# Altium PCB watch_pcb.PcbDoc
Units mm, origin at the board's own origin, x right, y up, seen from the top; angles counter-clockwise.
Board outline 49 x 49 mm, 2 copper layers (Top Layer, Bottom Layer); 53 components, 37 nets, 217 pads, 31 vias.
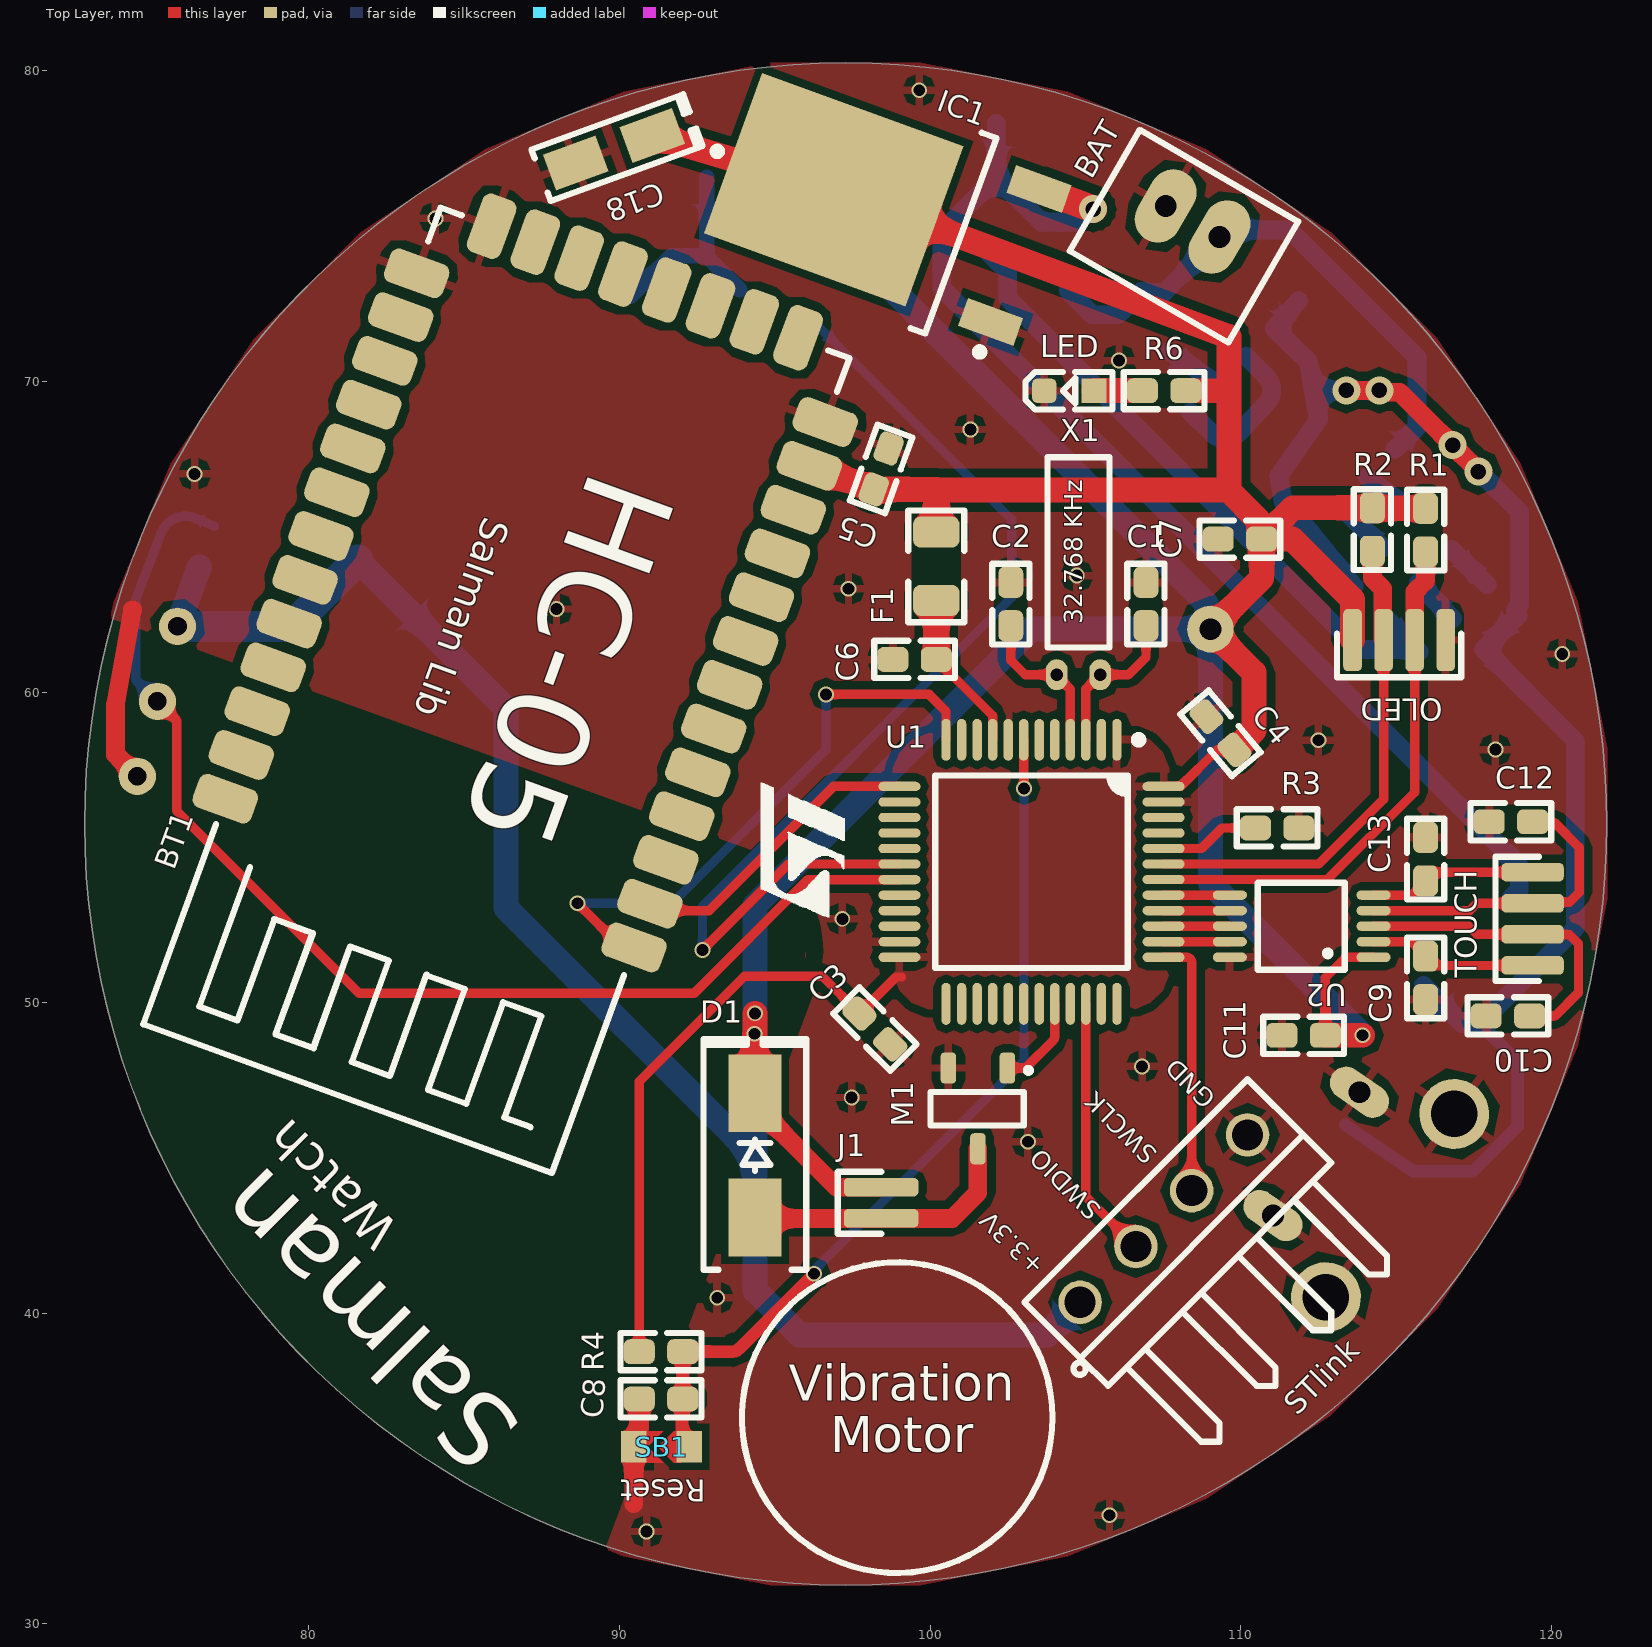
[diagram p0: Top Layer view]
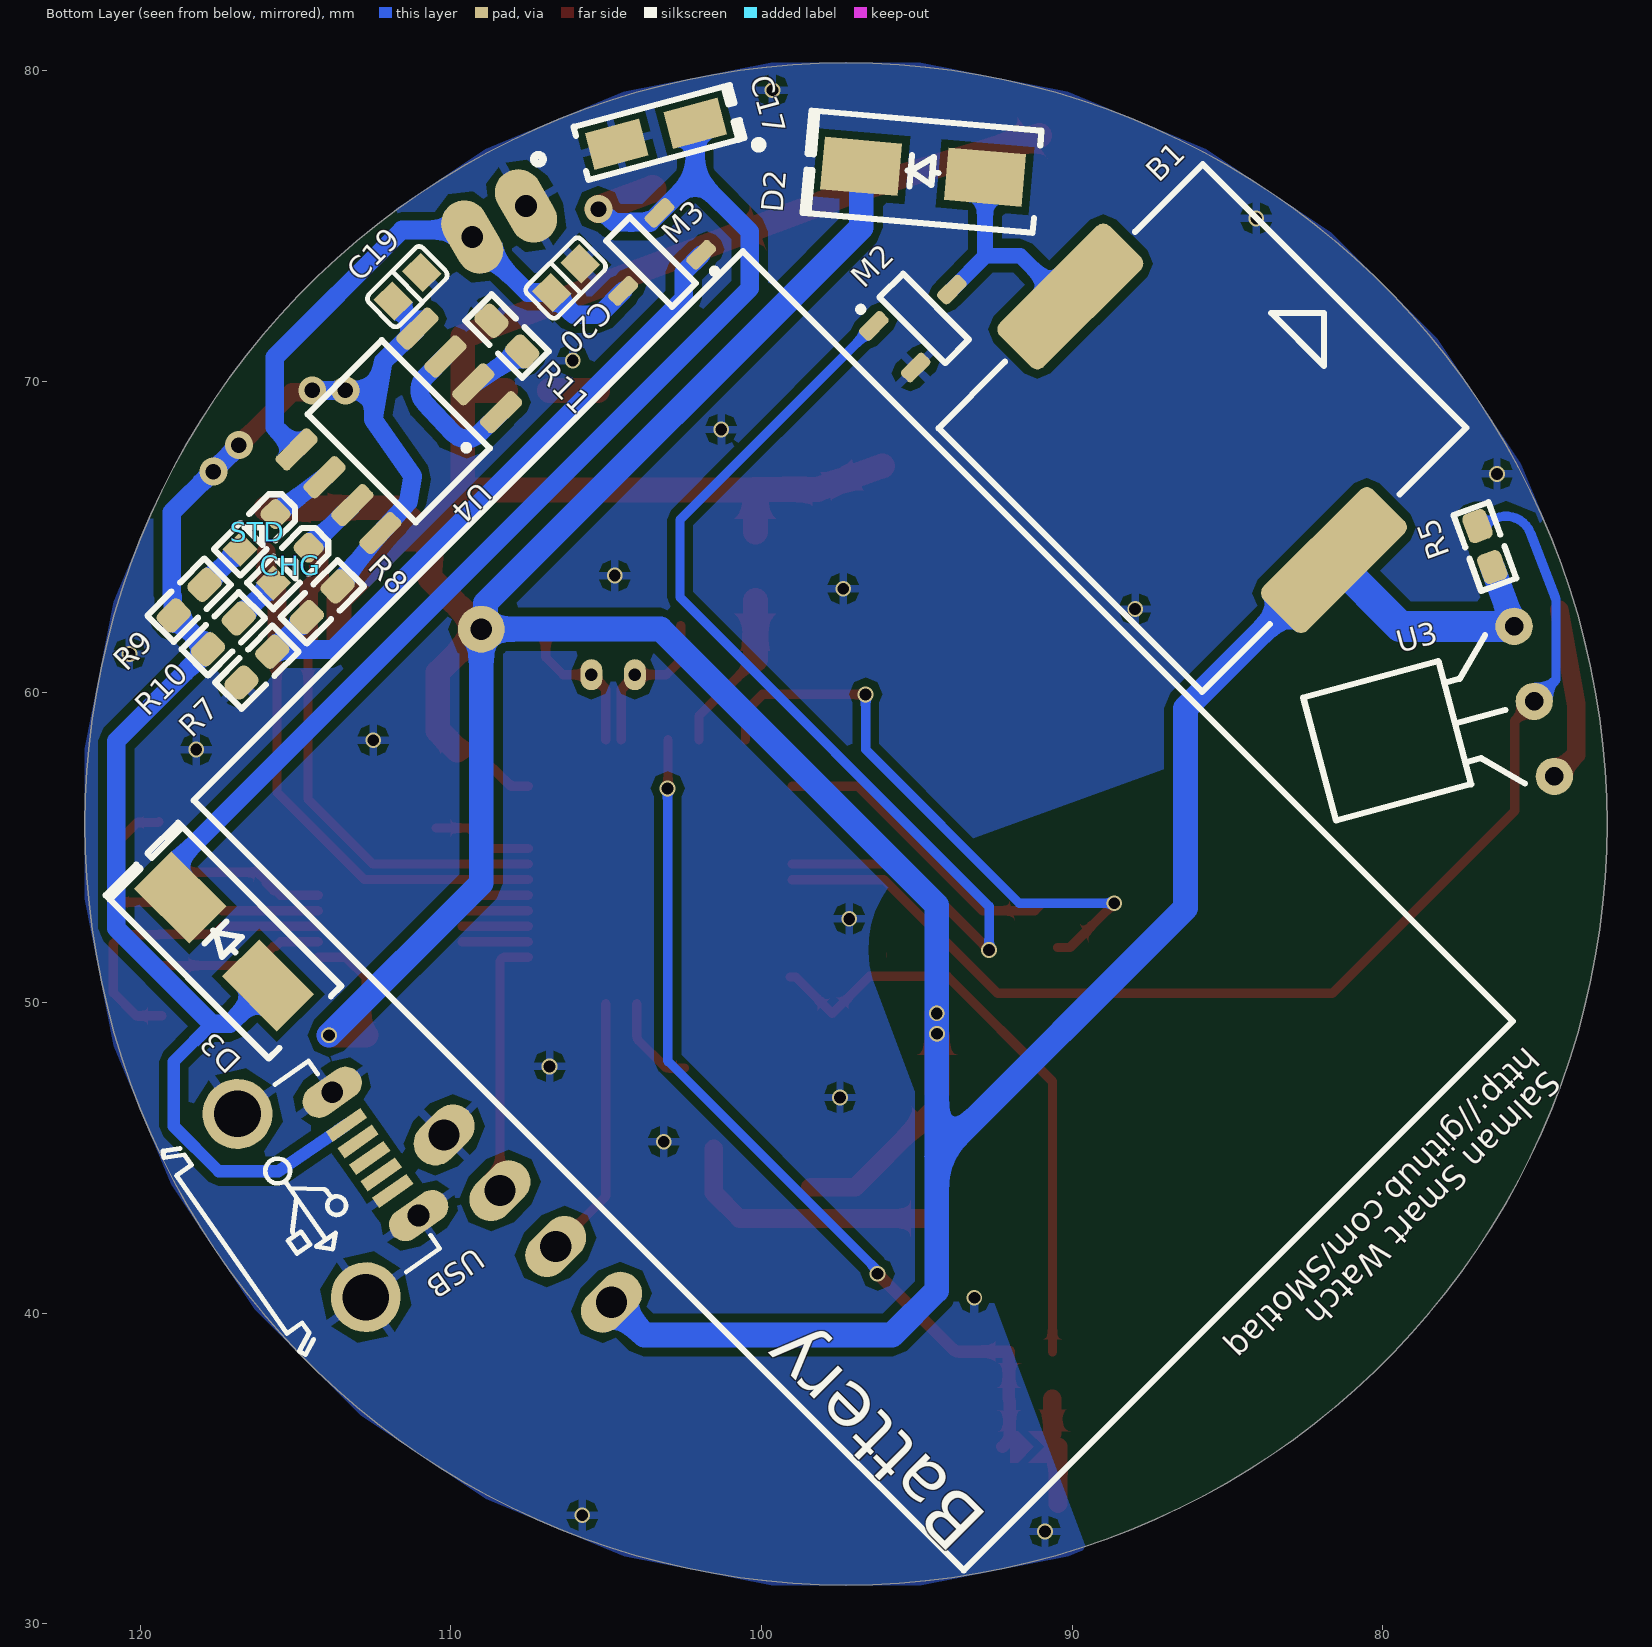
[diagram p1: Bottom Layer view, seen from below]

## Layer stack, top to bottom
Top Solder: solder mask 0.0102, Solder Resist, Dk 3.5
Top Layer: signal copper 0.0356
Dielectric 1: dielectric 0.32, FR-4, Dk 4.8
Bottom Layer: signal copper 0.0356
Bottom Solder: solder mask 0.0102, Solder Resist, Dk 3.5

## Board outline
72.782,55.753 ccw(c97.282,55.753) 97.282,31.253 ccw(c97.282,55.753) 121.782,55.753 ccw(c97.282,55.753) 97.282,80.253 ccw(c97.282,55.753)

## Design rules (kind name [scope] priority, off if disabled: settings)
Clearance [All] p1: gap=0.2 ignorepadtopadclearanceinfootprint=TRUE except(0: Arc-Hole Track-Hole SMDPad-Hole THPad-Hole Via-Hole Fill-Hole Poly-Hole Region-Hole Text-Hole; 0.25: Arc-Poly Track-Poly SMDPad-Poly THPad-Poly Via-Poly Fill-Poly Poly-Poly)
MinimumSolderMaskSliver [All] p1: minsoldermaskwidth=0.1
PlaneConnect [All] p1: planeconnectstyle=Direct reliefexpansion=0.508 reliefentries=4 reliefconductorwidth=0.254 reliefairgap=0.254
PolygonConnect [All] p1: connectstyle=Relief reliefconductorwidth=0.254 reliefentries=4 polygonreliefangle="90 Angle" airgapwidth=0.254
RoutingPriority GND_Priority [InNet('GND')] p1: routingpriority=0
RoutingPriority ALL_Priority [All] p2: routingpriority=97
RoutingPriority VCC_Priority [InNet('VCC')] p3: routingpriority=98
RoutingPriority 5_Priority [InNet('5V')] p4: routingpriority=99
RoutingPriority 24_Priority [InNet('24V')] p5: routingpriority=100
RoutingVias [All] p1: holewidth=0.381 width=0.508 viastyle="Through Hole" minholewidth=0.381 minwidth=0.508 maxholewidth=0.381 maxwidth=0.508
SilkToSolderMaskClearance [IsPad] p1: minsilkscreentomaskgap=0.1 clearancetoexposedcopper=TRUE
SolderMaskExpansion [All] p1: expansion=0.102 istentingtop=FALSE
Width power [(InNet('5V') AND InNet('24V'))] p1: maxlimit=2.54 minlimit=1.016 preferedwidth=1.524 minimp=50.000000 maximp=50.000000 favimp=50.000000
Width [All] p2: maxlimit=2.54 minlimit=0.203 preferedwidth=0.203 minimp=50.000000 maximp=50.000000 favimp=50.000000
26 further rules are at their usual default settings.

## Classes and differential pairs
component class Power: BAT C17 C18 C19 C20 CHG D3 IC1 LED M3 R6 R7 R8 R9 R10 R11 STD U4 USB
component class Audio: B1 D2 M2
component class Keys: C9 C10 C11 C12 C13 TOUCH U2
component class Motor: D1 J1 M1
component class Interface: OLED
component class HC-05: BT1
component class MCU: C1 C2 C3 C4 C5 C6 C7 C8 F1 R1 R2 R3 R4 R5 SB1 STlink U1 U3 X1

## Components (designator, comment, footprint, x,y, rotation, side; value= is the part's Value field where it differs from the comment)
B1 "Buzzer" BUZZER-CSPT12A 77.332,68.493 r45 bottom
BAT "JST BxB-PH-K 2Pin" "JST B2B-PH-K" 108.45,75.15 r330 top
BT1 "HC-05" HC-05 96.754,70.508 r160 top
C1 "10pF" 0603C 106.95,62.834 r270 top
C2 "10pF" 0603C 102.6,62.834 r270 top
C3 "10nF" 0603C 98.22,49.155 r135 top
C4 "100nF" 0603C 109.347,58.674 r310 top
C5 "100nF" 0603C 98.425,67.183 r250 top
C6 "100nF" 0603C 99.5,61.05 r0 top
C7 "4.7uF" 0603C 109.975,64.925 r0 top
C8 "100nF" 0603C 91.337,37.243 r180 top
C9 "5pF" 0603C 115.95,50.8 r90 top
C10 "5pF" 0603C 118.6,49.575 r0 top
C11 "100nF" 0603C 112.025,48.95 r0 top
C12 "5pF" 0603C 118.7,55.825 r0 top
C13 "5pF" 0603C 115.95,54.625 r270 top
C17 "10uF 10V" "CAP TANSMD 1206_3216 CASE A" 103.4,77.975 r345 bottom
C18 "10uF 10V" "CAP TANSMD 1206_3216 CASE A" 89.825,77.475 r200 top
C19 "10uF" "CAP 0603_1608" 111.4,73.05 r135 bottom
C20 "10uF" "CAP 0603_1608" 106.3,73.325 r135 bottom
CHG "LED SMD 0603 BLUE" LED_0603_RED 115.149,64.082 r135 bottom
D1 "USM1" "DO-214AC SMA" 94.361,45.085 r90 top
D2 "USM1" "DO-214AC SMA" 94.8,76.75 r5 bottom
D3 "SS34" "DO-214AC SMA" 117.3,51.975 r45 bottom
F1 "Ferrit" 0805F 100.2,64.05 r270 top
IC1 "LM1117-3.3" TD03B_N 98.638,75.542 r160 top
J1 "HDR2" HDR1SE_M_1X2 98.425,43.561 r270 top
LED "LED SMD 0603 GREEN" LED_0603_GREEN 104.475,69.7 r180 top
M1 "MOSFET" SOT-23 102.489,47.498 r180 top
M2 "MOSFET" SOT-23 96.1,72.075 r225 bottom
M3 "IRLML6402" SOT-23 102.225,73.8 r45 bottom
OLED "HDR4" HDR1SE_M_1X4 115.1,61.675 r0 top
R1 "4.7K" 0603R 115.951,65.213 r90 top
R2 "4.7K" 0603R 114.239,65.232 r90 top
R3 "10K" 0603R 111.175,55.625 r0 top
R4 "10K" 0603R 91.337,38.767 r0 top
R5 "4.7K" 0603R 76.714,64.683 r250 bottom
R6 "10K" 0603R 107.535,69.704 r0 top
R7 "10K" 0603R 116.247,60.804 r135 bottom
R8 "0 ohm" 0603R 114.143,62.907 r135 bottom
R9 "1K" 0603R 118.43,62.959 r315 bottom
R10 "1K" 0603R 117.326,61.876 r315 bottom
R11 "10K" 0603R 108.198,71.461 r45 bottom
SB1 "Solder Bridge" "Solder Bridge" 91.1,35.7 r0 top locked
STD "LED SMD 0603 GREEN" LED_0603_GREEN 116.218,65.165 r135 bottom
STlink "HDR1X4" HDRR_M_1X4 107.525,43.05 r45 top value=HDRM4
TOUCH "HDR4" HDR1SE_M_1X4 119.4,52.7 r270 top
U1 "STM32F030C8T6" "LQFP-48 7x7MM P0.5MM" 103.265,54.213 r270 top
U2 "4-channel capacitive touch driver" MSOP-10 114.275,53.463 r180 top
U3 "DS18B20" TO-92 75.772,62.115 r255 bottom
U4 "TP4056" SOIC-8 111.079,71.704 r315 bottom
USB "micro usb dip" MICRO_USB_DIP 114.8,43.475 r235 bottom
X1 "32.768 KHz" "32.768 - Right" 104.778,60.559 r90 top

## Footprints (in the part's own frame and the unit in brackets; to place one, negate y for a bottom-side part, rotate by r counter-clockwise, add the part's x,y. Pads: shape width x height; smd on the part's side, far side on the other; paste and mask are expansions set on the pad)
"32.768 - Right" [mm]
  rrect100% 1x0.7 hole 0.4: 1(0,-0.7) 2(0,0.7)
  silkscreen extent 0.87,-1 7,1, body extent -0.14,-1 7,1, height 2.1
0603C [mm] "1608, 160X80, 1.6x0.8mm (1.75x0.95mm)"
  rrect50% 1x0.8 smd mask+0.075: 1(-0.7,0) 2(0.7,0)
  silkscreen extent -1.3,-0.6 1.3,0.6, body extent -0.8,-0.4 0.8,0.4, height 0.9
0603R [mm] "1608, 160X80, 1.6x0.8mm (1.75x0.95mm)"
  rrect50% 1x0.8 smd mask+0.075: 1(-0.7,0) 2(0.7,0)
  silkscreen extent -1.3,-0.6 1.3,0.6, body extent -0.85,-0.4 0.85,0.4, height 0.56
0805F [mm] ",0805, 2012, 200X130"
  rrect50% 1x1.5 smd mask+0.075: 1(-1.1,0) 2(1.1,0)
  Top Layer pour cut-out: -0.5,0.8 0.5,0.8 0.5,-0.8 -0.5,-0.8
  silkscreen extent -1.8,-0.9 1.8,0.9, body extent -1.07,-0.67 1.08,0.68, height 1
BUZZER-CSPT12A [mm]
  rrect30% 2x5 smd: 1(0,6) 2(12,6)
  silkscreen extent 0,-0.02 12,12, body extent 0,0 12,12, height 3.07
"CAP 0603_1608" [mm] "Chip Capacitor, 2-Leads, Body 1.60x0.80mm, IPC Medium Density"
  rect 0.85x0.95 smd: 1(-0.65,0) 2(0.65,0)
  silkscreen extent -1.24,-0.7 1.23,0.7, body extent -0.8,-0.41 0.8,0.41, height 0.82
"CAP TANSMD 1206_3216 CASE A" [mm] "Molded Capacitor, 2-Leads, Body 3.20x1.6mm, Case A, IPC Medium Density"
  rect 1.8x1.23 smd: 1(-1.31,0) 2(1.31,0)
  silkscreen extent -3.22,-0.9 2.5,1.32, body extent -1.72,-0.85 1.71,0.85, height 1.7
"DO-214AC SMA" [mm] "Molded Diode, 2-Leads, Body 4.30x2.60mm, IPC Medium Density"
  rect 2.5x1.7 smd: 1(-2,0) 2(2,0)
  silkscreen extent -3.68,-1.65 3.75,1.65, body extent -2.6,-1.37 2.6,1.37, height 2.4
HC-05 [mm]
  rrect50% 2x1.15 smd: 1(-0.5,19.75) 2(-0.5,18.25) 3(-0.5,16.75) 4(-0.5,15.25) 5(-0.5,13.75) 6(-0.5,12.25) 7(-0.5,10.75) 8(-0.5,9.25) 9(-0.5,7.75) 10(-0.5,6.25) 11(-0.5,4.75) 12(-0.5,3.25) 13(-0.5,1.75) 22(13.5,1.75) 23(13.5,3.25) 24(13.5,4.75) 25(13.5,6.25) 26(13.5,7.75) 27(13.5,9.25) 28(13.5,10.75) 29(13.5,12.25) 30(13.5,13.75) 31(13.5,15.25) 32(13.5,16.75) 33(13.5,18.25) 34(13.5,19.75)
  rrect50% 1.15x2 smd: 14(1.25,-0.5) 15(2.75,-0.5) 16(4.25,-0.5) 17(5.75,-0.5) 18(7.25,-0.5) 19(8.75,-0.5) 20(10.25,-0.5) 21(11.75,-0.5)
  silkscreen extent -0.53,-0.5 13.5,27.48, body extent 0,0 13,27, height 4.31
HDR1SE_M_1X2 [mm] "HEADER, 1mm, test, SMD"
  rrect50% 0.6x2.4 smd mask+0.1: 1(-0.5,0) 2(0.5,0)
  silkscreen extent -1,-1.4 1,0
HDR1SE_M_1X4 [mm] "HEADER, 1mm, test, SMD"
  rrect50% 0.6x2 smd mask+0.1: 1(-1.5,0) 2(-0.5,0) 3(0.5,0) 4(1.5,0)
  silkscreen extent -2,-1.2 2,0.2
HDRR_M_1X4 [mm] "Connector; Header; 4 Position; Right Angle"
  round 1.4 / inner round 1.4 / far side oval 1.4x2.2 hole 1: 1(-3.81,0) 2(-1.27,0) 3(1.27,0) 4(3.81,0)
  silkscreen extent -5.53,-6.35 5.08,1.27, body extent -5.08,-7.35 5.08,1.27, height 5.45
"JST B2B-PH-K" [mm]
  oval 1.5x2.5 hole 0.7: 1(-1,0) 2(1,0)
  silkscreen extent -2.95,-2.8 2.95,1.7, body extent -2.95,-2.8 2.95,1.7, height 6
LED_0603_GREEN [mm] "LED SMD 0603, GREEN"
  rect 0.8x0.8 smd mask+0.075: 1(-0.8,0)
  rrect50% 0.8x0.8 smd mask+0.075: 2(0.8,0)
  silkscreen extent -1.4,-0.6 1.4,0.6, body extent -0.8,-0.4 0.8,0.4, height 0.5
LED_0603_RED [mm] "LED SMD 0603, RED"
  rect 0.8x0.8 smd mask+0.075: 1(-0.8,0)
  rrect50% 0.8x0.8 smd mask+0.075: 2(0.8,0)
  silkscreen extent -1.4,-0.6 1.4,0.6, body extent -0.8,-0.4 0.8,0.4, height 0.5
"LQFP-48 7x7MM P0.5MM" [mm] "LQFP, 48-Leads, Body 7.00x7.00mm, Pitch 0.50mm, IPC Medium Density"
  oval 1.35x0.3 smd: 1(-4.25,2.75) 2(-4.25,2.25) 3(-4.25,1.75) 4(-4.25,1.25) 5(-4.25,0.75) 6(-4.25,0.25) 7(-4.25,-0.25) 8(-4.25,-0.75) 9(-4.25,-1.25) 10(-4.25,-1.75) 11(-4.25,-2.25) 12(-4.25,-2.75) 25(4.25,-2.75) 26(4.25,-2.25) 27(4.25,-1.75) 28(4.25,-1.25) 29(4.25,-0.75) 30(4.25,-0.25) 31(4.25,0.25) 32(4.25,0.75) 33(4.25,1.25) 34(4.25,1.75) 35(4.25,2.25) 36(4.25,2.75)
  oval 0.3x1.35 smd: 13(-2.75,-4.25) 14(-2.25,-4.25) 15(-1.75,-4.25) 16(-1.25,-4.25) 17(-0.75,-4.25) 18(-0.25,-4.25) 19(0.25,-4.25) 20(0.75,-4.25) 21(1.25,-4.25) 22(1.75,-4.25) 23(2.25,-4.25) 24(2.75,-4.25) 37(2.75,4.25) 38(2.25,4.25) 39(1.75,4.25) 40(1.25,4.25) 41(0.75,4.25) 42(0.25,4.25) 43(-0.25,4.25) 44(-0.75,4.25) 45(-1.25,4.25) 46(-1.75,4.25) 47(-2.25,4.25) 48(-2.75,4.25)
  silkscreen extent -4.37,-3.1 3.1,3.58, body extent -4.51,-4.51 4.51,4.51, height 1.55
MICRO_USB_DIP [mm]
  rect 0.4x1.35 smd: 1(-1.3,2.666) 2(-0.65,2.666) 3(0,2.666) 4(0.65,2.666) 5(1.3,2.666)
  oval 1.05x2.1 hole 0.7: 6(2.425,2.891) 9(-2.425,2.891)
  round 2.25 hole 1.5: 7(3.6,-0.009) 8(-3.6,-0.009)
  Mechanical 8 keep-out region: -3.75,-2.159 -3.75,-0.759 3.75,-0.759 3.75,-2.159
  Mechanical 8 keep-out region: -2.85,-0.759 -2.85,0.741 2.85,0.741 2.85,-0.759
  Mechanical 8 keep-out region: -3.75,0.741 -3.75,1.941 3.75,1.941 3.75,0.741
  silkscreen extent -4,-2.76 4,2.84, body extent -4,-2.81 4,2.79, height 2.73
MSOP-10 [mm]
  rrect100% 1.1x0.3 smd: 1(0,2) 2(0,1.5) 3(0,1) 4(0,0.5) 5(0,0) 6(4.625,0) 7(4.625,0.5) 8(4.625,1) 9(4.625,1.5) 10(4.625,2)
  silkscreen extent 0.93,-0.4 3.73,2.4, body extent -0.13,-0.5 4.78,2.5, height 1.25
SOIC-8 [mm]
  rrect50% 1.5x0.6 smd: 1(0,3.81) 2(0,2.54) 3(0,1.27) 4(0,0) 5(5.5,0) 6(5.5,1.27) 7(5.5,2.54) 8(5.5,3.81)
  silkscreen extent 1.07,-0.55 4.45,4.38, body extent -0.25,-0.53 5.75,4.38, height 1.66
"Solder Bridge" [mil]
  rect 32x40 smd: 1(45.27,0) 2(-25.26,0)
  Top Layer region: 35.28,20 25.27,20 5.28,0 25.28,-20 35.27,-20
  Top Layer region: -17.76,0 -7.76,0 12.24,20 -17.75,20
  Top Layer region: -17.76,0 -7.76,0 12.24,-20 -17.76,-20
SOT-23 [mm]
  rrect50% 0.5x1 smd: 1(0,-0.4) 2(1.9,-0.4) 3(0.95,2.2)
  silkscreen extent -0.75,-0.4 2.48,1.45, body extent -0.53,-0.33 2.48,2.17, height 1.08
TD03B_N [mm] "D-PAK, 4-Leads, Body 6.1x6.6mm, Pitch 2.29mm, Lead Span 9.7mm, IPC Medium Density"
  rect 1.9x0.95 smd: 1(-4.35,2.28) 3(-4.35,-2.28)
  rect 6.9x5.5 smd: 4(1.85,0)
  silkscreen extent -4.47,-3.35 -2,3.43, body extent -5.18,-3.27 4.76,3.27, height 2.34
TO-92 [mm]
  round 1.2 hole 0.6: 1(5,0) 2(2.5,0) 3(0,0)
  silkscreen extent 0.02,-7.15 4.97,-0.98, body extent -0.35,-7.2 5.35,0.3, height 3.8

## Part data
BAT: "Connector Header Through Hole 0.079\" (2.00mm)", PartNumber=B2B-PH-K-S(LF)(SN)
C1 C2 C3 C4 C5 C6 C7 C8 C9 C10 C11 C12 C13: library part Cap, "Capacitor"
C17 C18: library part "Cap Tan Case A", "SMT Tantalum Capacitor"
C19 C20: library part "Cap 0603", "SMT Capacitor"
D1 D2: library part "US1M (SMD SMA)", "Diode Standard 1000V 1A Surface Mount SMA", PartNumber=US1M-13-F
D3: library part "US1M (SMD SMA)", "Diode Standard 1000V 1A Surface Mount SMA", PartNumber=SS34
F1: library part "Fuse SMD", "Ferrit 0805", ComponentLink1Description=Digikey, ComponentLink1URL=https://www.digikey.com/short/pz37qm, CurrentRating=Ferrit
IC1: library part LM1117DT-x.x, "x.x Volt, 800mA Low-Dropout Linear Regulator, 3-pin TO-252", Manufacturer="National Semiconductor", PackageTopMarking=NSUZXYTT*LM1117*DT-X.X, PartNumber=LM1117DT-3.3, PowerWise=N, Code_JEDEC=TO-252-AA, ComponentLink1Description="LM1117 Datasheet", ComponentLink1URL=http://www.national.com/ds/LM/LM1117.pdf, ComponentLink2Description="LM1117 Web Page", ComponentLink2URL=http://www.national.com/pf/LM/LM1117.html, ComponentLink3Description="TD03B Package Page", ComponentLink3URL=http://www.national.com/packaging/folders/td03b.html, CompType="LDO IC", DatasheetVersion=Apr-2006, PackageDescription="TO252, Molded, Jedec, 6.8 x 6.10 x 2.30mm Body, 3 Lead, 2.28mm Pitch, Surface Mount", PackageReference=TD03B, PackageVersion="revD, Feb-2009", PinCount=3, RoHS=N, Supplier 1=Farnell, Supplier 2=Farnell
J1: library part HDRTST_1X2, "HEADER, 1mm pitch, test, SMD", =http://www.chila.ir
M1 M2 M3: library part 2N7002A
  M3: Name=IRLML6402
OLED TOUCH: library part HDRTST_1X4, "HEADER, 1mm pitch, test, SMD", =http://www.chila.ir
R1 R2 R3 R4 R5 R6 R7 R8 R9 R10 R11: library part R
STlink: library part HDRR_M_1X4, "CONN, HEADER, RightAngle, Male, pitch: 2.54mm, 4POS", =http://www.chila.ir
U1: "ARM Cortex-M0 32-bit MCU, 64 KB Flash, 8 KB Internal RAM, 39 I/Os, 48-pin LQFP, -40 to 85 degC, Tray", I/Os (High Current)=39, Operating Frequency(F) (Processor speed) (MHz)=48, Supplier Part Number 1=497-14043-ND, Supply Voltage(Vcc) min (V)=2.4, ComponentLink1Description="Manufacturer URL", ComponentLink1URL=http://www.st.com/web/en/home.html, ComponentLink2Description=Datasheet, ComponentLink2URL=http://www.st.com/st-web-ui/static/active/en/resource/technical/document/datasheet/DM00088500.pdf, ComponentLink3Description="Package Specification", ComponentLink3URL=http://www.st.com/st-web-ui/static/active/en/resource/technical/document/datasheet/DM00058181.pdf, Core="ARM Cortex-M0", DatasheetVersion="Rev. 1", FLASH Size (Prog) (kB)=64, Internal RAM Size (kB)=8, Mounting Technology="Surface Mount", PackageDescription="48-Pin Low Profile Quad Flat Package, 7 x 7 mm Body, 0.5 mm Pitch", PackageReference=LQFP48, PackageVersion="Rev. 6, 06/2013", Packing=Tray, PartNumber=STM32F030C8T6, Supplier 1=Digi-Key, Supplier 2=Newark, Supplier 3=Mouser, Supplier Part Number 2=06X3647, Supplier Part Number 3=511-STM32F030C8T6
U2: library part BS814A-1
X1: library part XTAL, Frequency="32.768 KHz"

## Free pads (board coordinates)
  round 1.5 hole 0.7: 4(109.025,62.025)

## Via types
v1: diameter 0.508, hole 0.381, Top Layer to Bottom Layer, 25 vias
v2: diameter 0.9, hole 0.5, Top Layer to Bottom Layer, 3 vias
v3: diameter 0.9, hole 0.5, Top Layer to Bottom Layer, tented bottom, 2 vias
v4: diameter 0.508, hole 0.381, Top Layer to Bottom Layer, tented both sides, 1 vias

## Nets (pads, with @x,y where several pads share a name; then routed paths per layer and width w, separated by ;. In a path a pad name is that pad's centre, name@x,y a point inside that pad or via, vN(x,y) a via of type N, cw(c..) or ccw(c..) an arc to the next point about the centre after c; other vN are vias at no path point)
CHG_INP: C19.1 D3.1 R8.2 R9.2 R10.2 U4.4 U4.8 USB.1 | length 54
  Top Layer w0.6: v3(113.401,69.711) v3(114.464,69.711) 114.519,69.656 115.119,69.656 v2(116.825,67.95) v2@117.663,67.112
  Bottom Layer w0.4: USB.1 115.555,44.575 117.475,44.575 118.925,46.025 118.925,48.1 117.7,49.325
  Bottom Layer w0.6: C19.1 U4.4 112.174,70.646 112.339,69.711 ; R8.2 U4.8 111.374,66.113 111.226,66.95 112.503,68.775 112.339,69.711 ; v3(114.464,69.711) v3(113.401,69.711) 112.339,69.711 ; D3.1 117.122,49.325 117.7,49.325 120.775,52.4 120.775,58.427 R10.2 R9.2 118.854,62.534 118.854,62.676 118.961,62.783 118.961,63.066 118.988,63.093 118.988,65.787 117.663,67.112 v2(116.825,67.95)
  other v2: 117.65,67.1
CHG_OUT: BAT.2 C20.1 M3.3 U4.5 | length 17.6
  Bottom Layer w0.6: M3.3 105.219,72.15 106.044,72.15 C20.1 106.795,72.901 106.972,72.901 107.007,72.865 107.531,72.865 BAT.2 109.541,74.875 111.575,74.875 115.675,70.775 115.675,68.522 U4.5
GND: BAT.1 BT1.13 BT1.21 BT1.22 C1.1 C2.1 C3.1 C4.1 C5.1 C6.1 C7.1 C8.2 C9.1 C10.1 C11.1 C12.1 C13.1 C17.2 C18.2 C19.2 C20.2 IC1.1 LED.2 M1.2 M2.2 OLED.4 R3.2 R7.1 R11.2 SB1.2 STlink.4 U1.8 U1.23 U1.47 U2.10 U3.1 USB.5 USB.6 USB.7 USB.8 USB.9 | length 8.6
  Top Layer w0.6: 74.325,62.65 73.775,59.6 73.775,57.988 U3.1 ; 90.459,33.875 SB1.2 ; SB1.2@90.637,36.143 C8.2
  other v1: 90.874,32.975 105.775,33.5 93.15,40.5 103.15,45.525 97.475,46.95 106.825,47.95 97.175,52.7 118.198,58.148 112.5,58.45 120.35,61.225 87.973,62.673 97.373,63.327 104.725,63.75 76.323,67.023 101.298,68.452 106.08,70.675 84.075,75.25 99.65,79.375
Key1: C9.2 TOUCH.4 U2.2 | length 5.5
  Top Layer w0.3: U2.2 115.487,51.963 115.631,51.819 115.704,51.819 115.95,51.573 C9.2 115.95,51.491 116.241,51.2 TOUCH.4
Key2: C10.2 TOUCH.3 U2.3 | length 10.3
  Top Layer w0.3: U2.3 117.337,52.463 117.6,52.2 TOUCH.3 119.411,52.189 120.586,52.189 120.875,51.9 120.875,50.325 120.125,49.575 C10.2
Key3: C12.2 TOUCH.2 U2.4 | length 10.2
  Top Layer w0.3: U2.4 117.363,52.963 117.6,53.2 TOUCH.2 119.436,53.236 120.586,53.236 120.9,53.55 120.9,55 120.1,55.8 119.425,55.8 C12.2
Key4: C13.2 TOUCH.1 U2.5 | length 5.5
  Top Layer w0.3: U2.5 115.488,53.463 115.631,53.606 115.704,53.606 115.95,53.852 C13.2@115.95,53.909 ; C13.2 C13.2@115.95,53.909 ; TOUCH.1 116.241,54.2 C13.2@115.95,53.909
NetB1_2: B1.2 D2.1 M2.3 | length 7.3
  Bottom Layer w0.3: 92.781,74.05 92.808,74.076
  Bottom Layer w0.5: B1.2 90.36,72.735 91.675,74.05 92.781,74.05 M2.3 ; 92.808,74.076 D2.1
NetBT1_1: BT1.1 U1.12 | length 19.2
  Top Layer w0.3: v1(88.646,53.201) 90.068,51.779 BT1.1 ; v1(96.65,59.925) 99.968,59.925 100.515,59.378 U1.12
  Bottom Layer w0.3: v1(88.646,53.201) 91.701,53.201 96.65,58.15 v1(96.65,59.925)
NetBT1_2: BT1.2 U1.13 | length 9.8
  Top Layer w0.3: BT1.2 91.211,52.959 92.884,52.959 96.888,56.963 U1.13
NetC1_2: C1.2 U1.3 X1.1 | length 5
  Top Layer w0.3: U1.3 105.015,60.097 105.233,60.314 105.248,60.314 105.478,60.544 X1.1 106.384,60.559 106.95,61.125 C1.2
NetC2_2: C2.2 U1.4 X1.2 | length 5
  Top Layer w0.3: C2.2 102.6,61.025 103.066,60.559 X1.2 ; X1.2@104.078,60.526 104.515,60.089 U1.4
NetC6_2: C6.2 F1.2 U1.9 | length 5.3
  Top Layer w0.3: C6.2 100.273,61.05 100.519,60.804 100.519,60.731 102.015,59.235 U1.9
  Top Layer w0.8: C6.2 F1.2
NetCHG_1: CHG.1 R10.1 | length 1.6
  Bottom Layer w0.6: CHG.1 R10.1
NetCHG_2: CHG.2 U4.7 | length 2
  Bottom Layer w0.6: U4.7 CHG.2
NetD1_1: D1.1 J1.2 M1.3 | length 9
  Top Layer w0.6: D1.1 94.393,43.053 98.417,43.053 J1.2 98.433,43.053 100.711,43.053 101.539,43.881 M1.3
NetLED_1: LED.1 R6.1 | length 1.6
  Top Layer w0.8: LED.1 105.279,69.704 R6.1
NetM1_1: M1.1 U1.32 | length 3
  Top Layer w0.3: M1.1 cw(c102.518,47.697) 102.519,47.9 102.991,47.9 ccw(c102.991,48.103) 103.135,47.96 103.954,48.779 ; 103.955,48.78 ccw(c103.811,48.924) 104.015,48.923 U1.32
NetM2_1: M2.1 U1.18 | length 34.3
  Top Layer w0.3: v1(92.675,51.7) 95.438,54.463 U1.18
  Bottom Layer w0.3: v1(92.675,51.7) 92.675,53.1 102.625,63.05 102.625,65.55 M2.1
NetM3_1: M3.1 R7.2 R8.1 | length 21.1
  Bottom Layer w0.6: M3.1 102.5,73.525 102.5,72.675 113.806,61.369 115.681,61.369 R7.2 ; R8.1 R7.2@115.654,61.369
NetOLED_2: OLED.2 R2.1 U1.43 | length 16.1
  Top Layer w0.3: U1.43 112.513,54.463 114.6,56.55 OLED.2 OLED.2@114.575,61.7
  Top Layer w0.6: R2.1 114.24,63.66 114.575,63.325 OLED.2@114.575,61.7
NetOLED_3: OLED.3 R1.1 U1.42 | length 17.1
  Top Layer w0.3: U1.42 112.788,53.963 115.6,56.775 OLED.3
  Top Layer w0.6: OLED.3 115.6,63.225 115.951,63.576 R1.1
NetR3_1: R3.1 U1.44 | length 3.2
  Top Layer w0.3: U1.44 108.738,54.963 109.4,55.625 R3.1
NetR5_1: R5.1 U1.19 U3.2 | length 38.9
  Top Layer w0.3: U3.2 75.75,59.075 75.75,56.175 81.625,50.3 92.4,50.3 96.063,53.963 U1.19
  Bottom Layer w0.3: U3.2 74.425,60.4 74.425,62.922 cw(c74.725,62.922) 74.445,63.029 75.247,65.122 75.248,65.123 cw(c76.031,64.82) 76.36,65.593 76.362,65.592 R5.1
NetR9_1: R9.1 STD.1 | length 1.6
  Bottom Layer w0.6: STD.1 R9.1
NetR11_1: R11.1 U4.2 | length 1.9
  Bottom Layer w0.6: R11.1 U4.2
NetSTD_2: STD.2 U4.6 | length 2
  Bottom Layer w0.6: U4.6 STD.2
NetU1_38: U1.38 U2.9 | length 2.1
  Top Layer w0.203: U2.9@109.637,51.963 U2.9@109.65,51.95
  Top Layer w0.3: U1.38 U2.9@109.637,51.963
NetU1_39: U1.39 U2.8 | length 2.1
  Top Layer w0.203: U2.8@109.637,52.463 U2.8@109.65,52.45
  Top Layer w0.3: U1.39 U2.8@109.637,52.463
NetU1_40: U1.40 U2.7 | length 2.1
  Top Layer w0.203: U2.7@109.637,52.963 U2.7@109.65,52.95
  Top Layer w0.3: U1.40 U2.7@109.637,52.963
NetU1_41: U1.41 U2.6 | length 2.1
  Top Layer w0.203: U2.6@109.637,53.463 U2.6@109.65,53.45
  Top Layer w0.3: U1.41 U2.6@109.637,53.463
NetU4_1: U4.1 U4.3 | length 5.1
  Bottom Layer w0.6: U4.1 109.077,68.327 ccw(c109.498,68.755) 109.936,68.345 110.84,69.311 ccw(c110.403,69.721) 110.832,70.14 ; U4.3 110.832,70.14
NRST: C8.1 R4.2 SB1.1 U1.7 | length 28.4
  Top Layer w0.3: U1.7 103.015,56.91 v1(103.025,56.9)
  Top Layer w0.4: SB1.1 92.129,35.821 cw(c92.412,36.104) 92.012,36.104 92.012,37.104 cw(c92.412,37.104) 92.031,37.226 92.036,37.242 R4.2 93.634,38.767 ccw(c93.634,39.067) 93.846,38.855 v4(96.266,41.275)
  Bottom Layer w0.3: v4(96.266,41.275) 96.266,41.331 96.37,41.435 96.37,41.482 102.991,48.103 ; 103,48.103 103.025,48.128 v1(103.025,56.9)
SUP: C17.1 D3.2 IC1.3 M3.2 | length 39.2
  Top Layer w0.9: IC1.3 v2(105.25,75.55)
  Bottom Layer w0.6: C17.1 102.135,76.577 ; M3.2@103.594,75.119 M3.2 102.135,76.577 ; M3.2@103.6,75.125 104.744,75.125 v2(105.25,75.55) ; D3.2 118.961,53.636 118.961,54.414 100.375,73 100.375,74.818 102.135,76.577
SWCLK: STlink.3 U1.37 | length 8.3
  Top Layer w0.3: U1.37 108.247,51.463 cw(c108.247,51.288) 108.423,51.288 108.423,47.373 STlink.3
SWDIO: STlink.2 U1.34 | length 8.5
  Top Layer w0.3: U1.34 105.015,43.764 STlink.2
VCC: B1.1 BT1.12 C3.2 C4.2 C5.2 C7.2 C11.2 C18.1 D1.2 D2.2 F1.1 IC1.4 J1.1 OLED.1 pad.4 R1.2 R2.2 R4.1 R5.2 R6.2 STlink.1 U1.1 U1.24 U1.48 U2.1 U3.3 | length 207.9
  Top Layer w0.3: R4.1 90.637,47.462 94.025,50.85 96.525,50.85 C3.2 98.9,50.825 99.075,50.825 ; U1.48 108.063,56.963 109.246,58.146 C4.2@109.789,58.146 ; C11.2 112.725,50.8 113.375,51.45 113.375,51.463 U2.1
  Top Layer w0.6: D1.2@94.35,47.096 94.35,46.696 94.911,46.135 94.915,46.135 96.989,44.061 J1.1
  Top Layer w0.8: C18.1 IC1.4 109.621,71.442 109.621,69.7 109.621,66.479 110.575,65.525 110.575,64.925 C7.2 ; D1.2@94.35,47.096 v1@94.35,48.975 ; v1@94.361,48.975 v1(94.361,49.657) ; BT1.12 C5.2 100.225,66.525 ; F1.1 100.2,66.5 109.6,66.5 ; R6.2 108.452,69.704 108.456,69.7 109.6,69.7 ; C4.2@109.789,58.146 C4.2 110.425,58.766 110.425,60.625 pad.4 110.675,63.675 C7.2 ; C11.2 v1(113.925,48.95) ; OLED.1 113.6,62.982 111.657,64.925 C7.2@110.775,64.925 ; R1.2 114.259,65.913 R2.2 111.682,65.932 110.775,65.025 C7.2@110.775,64.925 ; C7.2 C7.2@110.775,64.925
  Bottom Layer w0.8: U3.3 R5.2 ; B1.1 86.35,59.475 86.35,53.05 94.361,45.039 ; D2.2 96.792,74.958 108.891,62.859 108.891,62.159 pad.4 ; STlink.1 103.775,39.3 95.8,39.3 94.361,40.739 94.361,45.039 ; v1(113.925,48.95) 109.025,53.85 pad.4 ; 94.361,45.039 v1(94.361,49.657) 94.361,53.136 103.25,62.025 pad.4
  Bottom Layer w1: U3.3 79.44,62.115 B1.1
  other v1: 94.35,49
pads on no net: BT1.3 BT1.4 BT1.5 BT1.6 BT1.7 BT1.8 BT1.9 BT1.10 BT1.11 BT1.14 BT1.15 BT1.16 BT1.17 BT1.18 BT1.19 BT1.20 BT1.23 BT1.24 BT1.25 BT1.26 BT1.27 BT1.28 BT1.29 BT1.30 BT1.31 BT1.32 BT1.33 BT1.34 U1.2 U1.5 U1.6 U1.10 U1.11 U1.14 U1.15 U1.16 U1.17 U1.20 U1.21 U1.22 U1.25 U1.26 U1.27 U1.28 U1.29 U1.30 U1.31 U1.33 U1.35 U1.36 U1.45 U1.46 USB.2 USB.3 USB.4

## Polygon pours and split planes (outlines as drawn)
GND on Top Layer "3.3 poly" (solid, remove dead copper, pour order 4): 121.793,55.764 ccw(c97.293,55.764) 97.293,80.264 ccw(c97.293,55.742) 72.771,55.742 ccw(c97.271,55.742) 97.271,31.242 ccw(c97.271,55.764)
VCC on Top Layer "3.3 poly" (solid, remove dead copper, pour order 1): 98.806,57.277 98.806,51.181 ccw(c100.203,51.181) 100.203,49.784 106.299,49.784 ccw(c106.299,51.181) 107.696,51.181 107.696,57.277 ccw(c106.299,57.277) 106.299,58.674 100.203,58.674 ccw(c100.203,57.277)
no net on Top Layer "3.3 poly" (solid, remove dead copper, pour order 0): 94.117,50.857
GND on Bottom Layer "3.3 poly" (solid, remove dead copper, pour order 3): 121.793,55.764 ccw(c97.293,55.764) 97.293,80.264 ccw(c97.293,55.742) 72.771,55.742 ccw(c97.271,55.742) 97.271,31.242 ccw(c97.271,55.764)

## Other copper
Top Layer:
  pour cut-out: 73.66,62.357 94.357,54.871 cw(c93.219,51.727) 96.351,50.555 89.574,32.497 cw(c95.674,54.919)
Bottom Layer:
  pour cut-out: 73.66,62.357 94.366,54.868 cw(c93.232,51.733) 96.354,50.564 89.574,32.497 cw(c95.674,54.919)

## Silkscreen, mask and mechanical layers (free items; w line width, h text height)
Top Overlay:
  drawing of 399 lines, arcs and shapes, not listed
  text "GND" at 109.367,47.092 h1 r135
  text "SWCLK" at 107.492,45.292 h1 r135
  text "SWDIO" at 105.692,43.492 h1 r135
  text "Watch" at 83.231,43.028 h2 r135
  text "+3.3V" at 103.867,41.692 h1 r135
  text "Salman" at 87.502,36.929 h4 r135
  text "Vibration" at 95.452,36.795 h2
  text "Motor" at 96.78,35.139 h2
  text "Reset" at 92.775,34.888 h1.2 r180
Bottom Overlay:
  lines w0.2: 75.815,49.403 100.601,74.189 118.279,56.511 93.493,31.726 75.815,49.403
  text "http://github.com/SMotlaq" at 75.613,48.813 h1.3 r135
  text "Salman Smart Watch" at 74.919,48.044 h1.3 r135
  text "Battery" at 92.249,33.851 h3 r225
Mechanical 1:
  circle w0.2: c97.282,55.753 r24.5

## Text inside footprints (layer, text, board x,y; h text height)
BT1: Top Overlay "Salman Lib" at 85.394,65.784 h1.5 r250